# Altium PCB PCB.PcbDoc
Units mil, origin at the board's own origin, x right, y up, seen from the top; angles counter-clockwise.
Board outline 1390 x 1665 mil, 2 copper layers (Top Layer, Bottom Layer); 19 components, 11 nets, 53 pads, 7 vias.
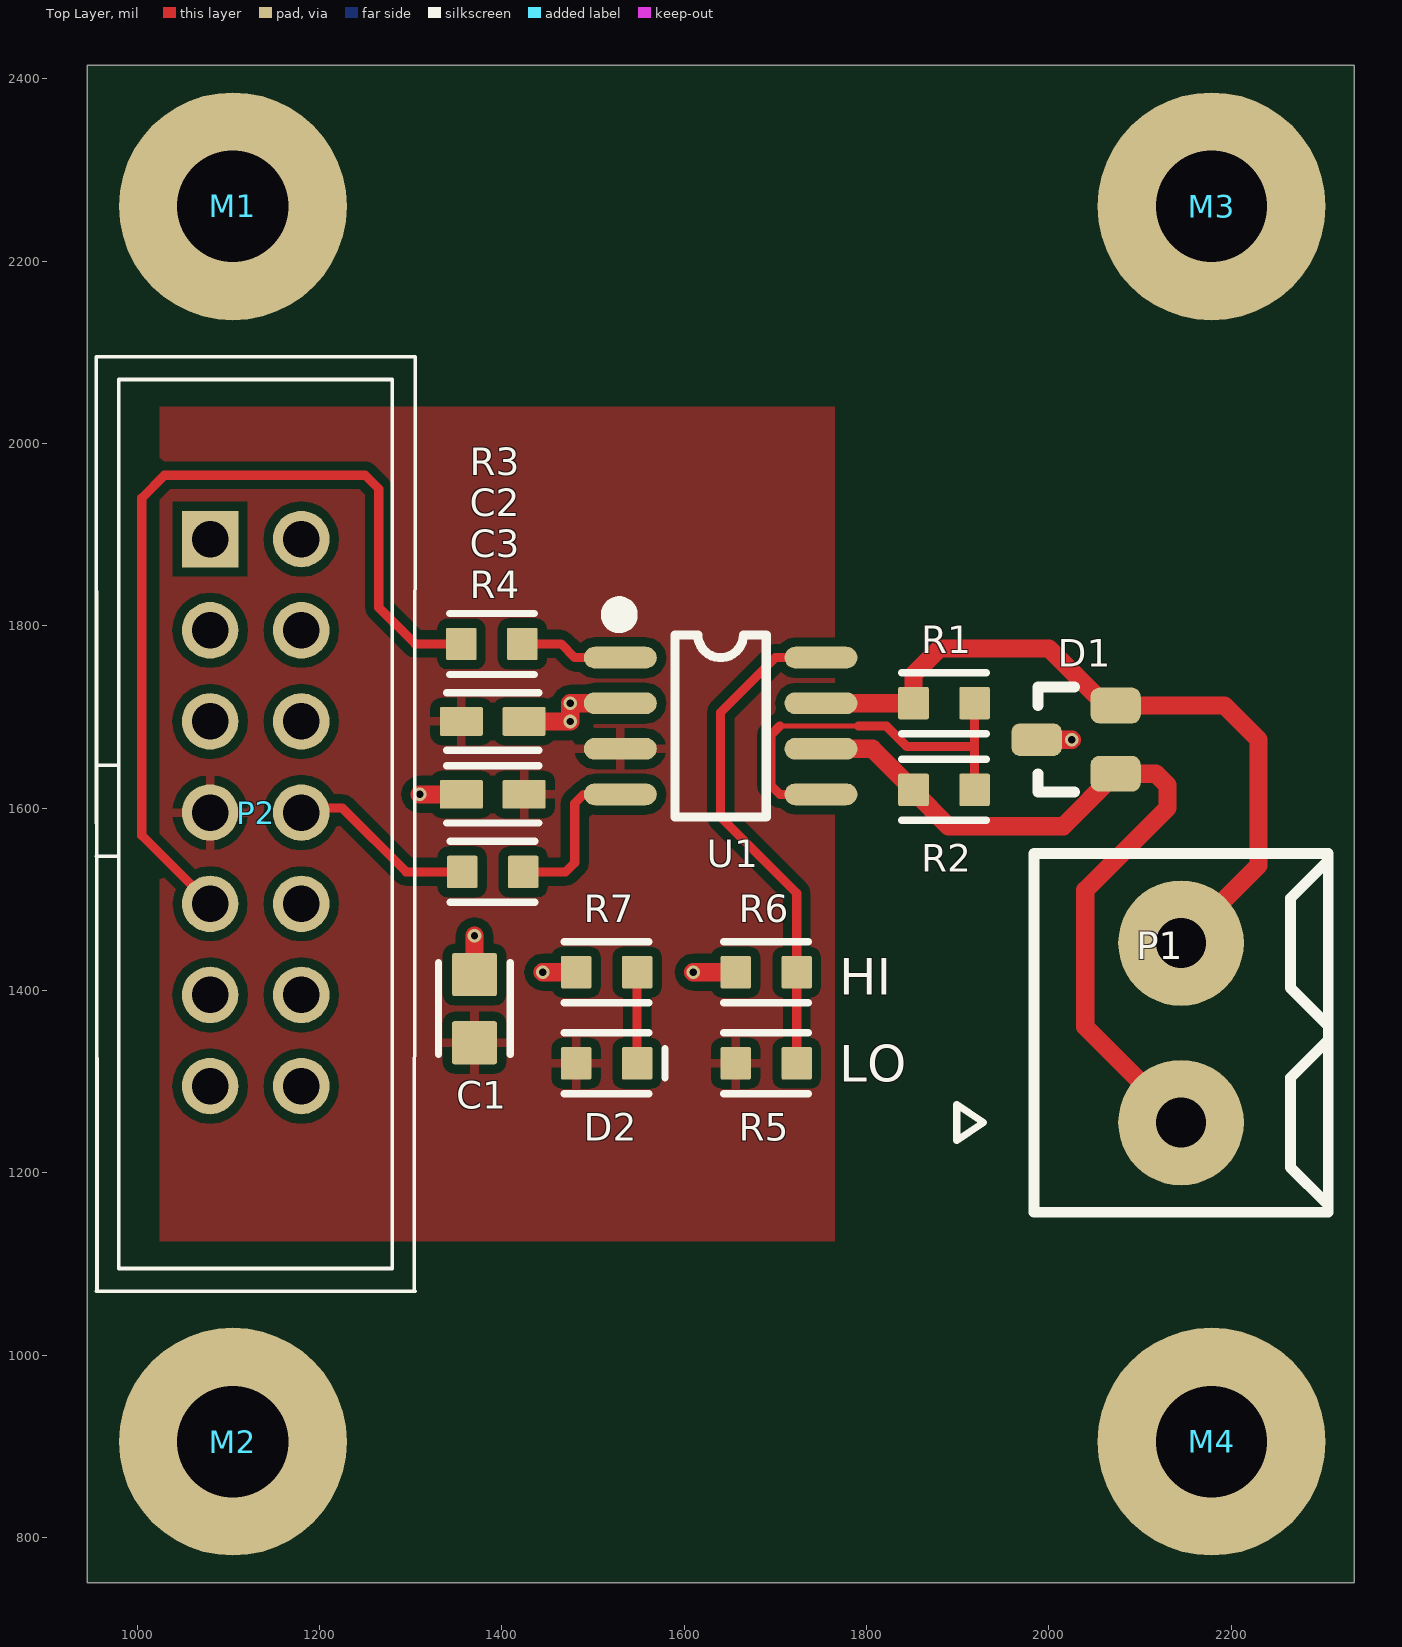
[diagram p0: Top Layer view]
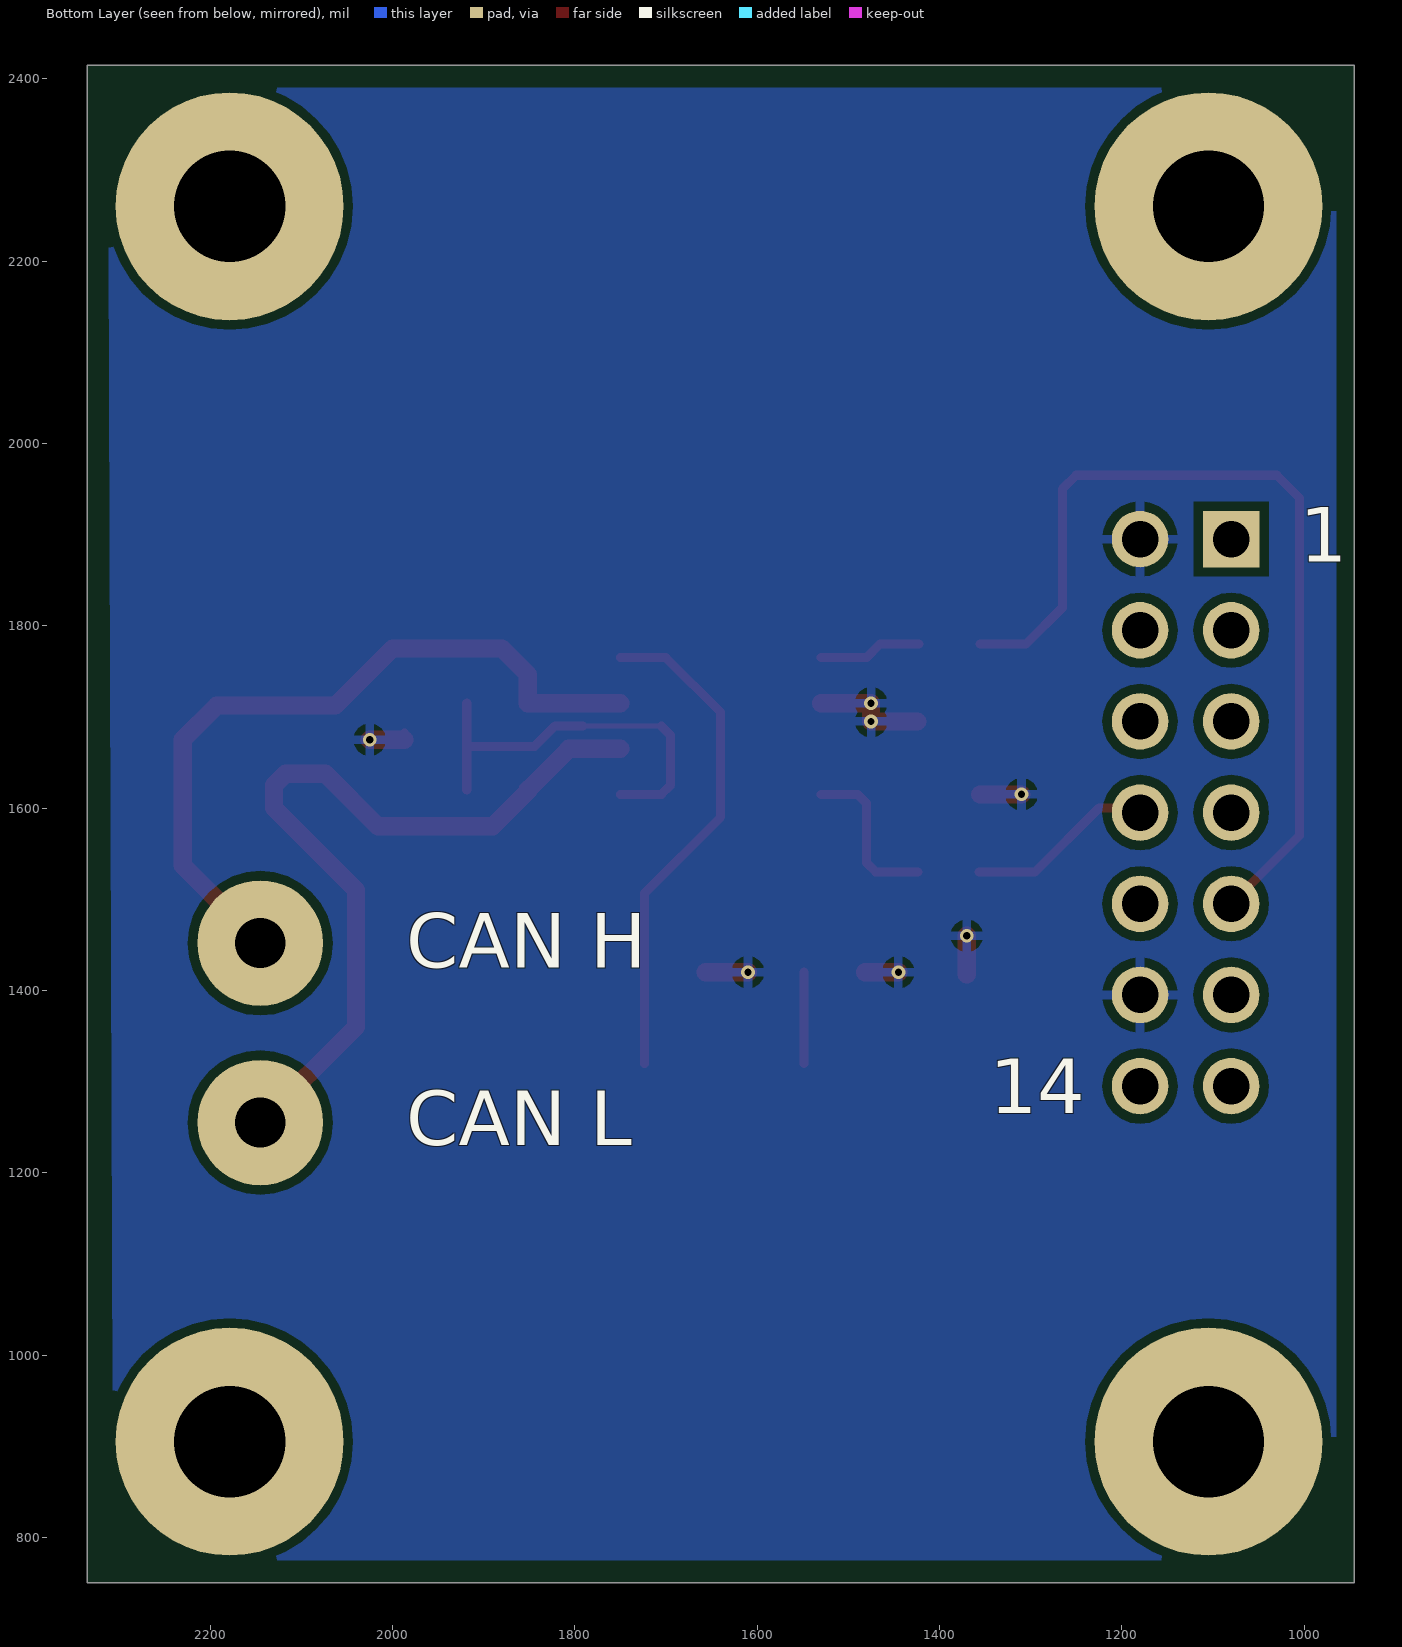
[diagram p1: Bottom Layer view, seen from below]
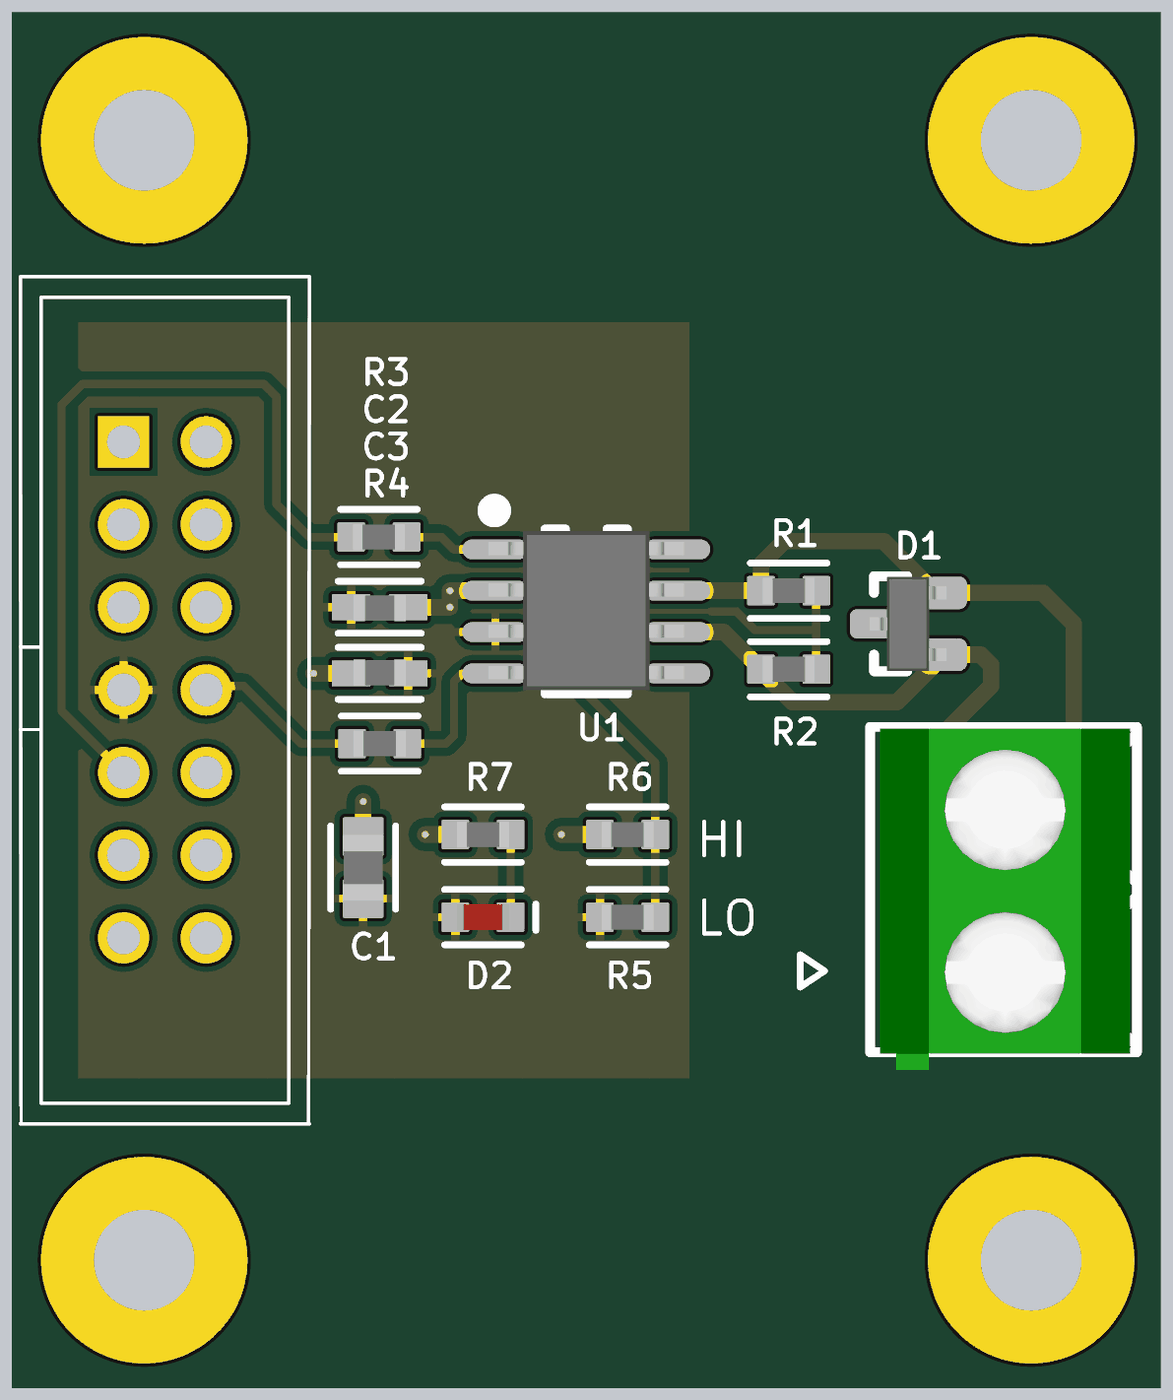
[diagram p2: 3D render of the assembled board from above, using the file's embedded part models]

## Layer stack, top to bottom
Top Solder: solder mask 0.4, Solder Resist, Dk 3.5
Top Layer: signal copper 1.4
Dielectric 1: dielectric 12.6, FR-4, Dk 4.8
Bottom Layer: signal copper 1.4
Bottom Solder: solder mask 0.4, Solder Resist, Dk 3.5

## Board outline
945,750 945,2415 2335,2415 2335,750

## Design rules (kind name [scope] priority, off if disabled: settings)
Clearance [All] p1: gap=10
PolygonConnect [All] p1: connectstyle=Relief reliefconductorwidth=10 reliefentries=4 polygonreliefangle="90 Angle" airgapwidth=10
RoutingVias [All] p1: holewidth=28 width=50 viastyle="Through Hole" minholewidth=28 minwidth=50 maxholewidth=28 maxwidth=50
SolderMaskExpansion [All] p1: expansion=4
Width [All] p1: maxlimit=1000 minlimit=6 preferedwidth=10
30 further rules are at their usual default settings.

## Classes and differential pairs
component class Shematic: C1 C2 C3 D1 D2 P1 P2 R1 R2 R3 R4 R5 R6 R7 U1

## Components (designator, comment, footprint, x,y, rotation, side; value= is the part's Value field where it differs from the comment)
C1 "GRM21BR61A106KE19L" CAPC2012 1370,1380 r90 top
C2 "GCM188R71C105KA64D" CAPC1608 1390,1695 r0 top
C3 "GRJ188R71H104KE11D" CAPC1608 1390,1615 r180 top
D1 "SZNUP2105LT3G" SOT23_A2A1K 2030,1675 r180 top
D2 "LTST-C191KGKT" LEDC1608M_AK 1515,1320 r0 top
M1 "M" MOUNTING 1105,2260 r0 top
M2 "M" MOUNTING 1105,905 r0 top
M3 "M" MOUNTING 2178.5,2260 r0 top
M4 "M" MOUNTING 2178.5,905 r0 top
P1 "Header 2" TERM_BLOCK_2_HORZ_RIACON01 2145,1255 r90 top
P2 "Header 7X2" IDC14-B 1080,1895 r270 top
R1 "CR0603-FX-60R4ELF" RESC1608 1885,1715 r180 top
R2 "CR0603-FX-60R4ELF" RESC1608 1885,1620 r0 top
R3 "CR0603-FX-23R2ELF" RESC1608 1389.02,1780 r180 top
R4 "CR0603-FX-23R2ELF" RESC1608 1390,1530 r180 top
R5 "CR0603-J/-000ELF" RESC1608 1690,1320 r180 top
R6 "CR0603-J/-000ELF" RESC1608 1690,1420 r0 top
R7 "CR0603-FX-1001ELF" RESC1608 1515,1420 r0 top
U1 "SN65HVD230D" SOIC127P580-8N 1640,1690 r0 top

## Footprints (in the part's own frame and the unit in brackets; to place one, negate y for a bottom-side part, rotate by r counter-clockwise, add the part's x,y. Pads: shape width x height; smd on the part's side, far side on the other; paste and mask are expansions set on the pad)
CAPC1608 [mm] "Chip Capacitor, Non Polarised 1.6mm x 0.8mm x ?mm (0603)"
  rrect10% 1.2x0.8 smd: 1(-0.875,0) 2(0.875,0)
  silkscreen extent -1.28,-0.8 1.28,0.8, body extent -0.8,-0.43 0.8,0.39, height 0.86
CAPC2012 [mm] "Chip Capacitor, Non Polarised 2.0mm x 1.2mm x ?mm (0805)"
  rrect10% 1.2x1.25 smd: 1(-0.95,0) 2(0.95,0)
  silkscreen extent -1.28,-1 1.28,1, body extent -1,-0.63 1,0.63, height 1.27
IDC14-B [mil]
  rect 62x62 hole 40: 1(0,0)
  round 62 hole 40: 2(0,100) 3(100,0) 4(100,100) 5(200,0) 6(200,100) 7(300,0) 8(300,100) 9(400,0) 10(400,100) 11(500,0) 12(500,100) 13(600,0) 14(600,100)
  silkscreen extent -200,-125 825,225, body extent -202,-125 825,225, height 358
LEDC1608M_AK [mm] "LED, Chip, 0603"
  rrect10% 0.85x0.9 smd: A(-0.85,0) K(0.85,0)
  silkscreen extent -1.18,-0.85 1.62,0.85, body extent -0.8,-0.4 0.8,0.39, height 1.09
MOUNTING [mm]
  round 6.35 hole 3.1: 1(0,0)
RESC1608 [mm] "Chip Resistor, 1.6mm x 0.8mm x ?mm (0603)"
  rrect10% 0.85x0.9 smd: 1(-0.85,0) 2(0.85,0)
  silkscreen extent -1.18,-0.85 1.18,0.85, body extent -0.8,-0.4 0.8,0.4, height 0.4
SOIC127P580-8N [mil]
  oval 80x24 smd: 1(-110,75) 2(-110,25) 3(-110,-25) 4(-110,-75) 5(110,-75) 6(110,-25) 7(110,25) 8(110,75)
  silkscreen extent -119,-100 50,130, body extent -118,-95 118,97, height 61
SOT23_A2A1K [mm]
  rrect50% 1.4x1 smd: 1(-1.1,0.95) 2(-1.1,-0.95)
  rrect50% 1.4x0.9 smd: 3(1.1,0)
  silkscreen extent 0.04,-1.46 1.06,1.46, body extent -1.17,-1.45 1.2,1.45, height 1
TERM_BLOCK_2_HORZ_RIACON01 [mm]
  round 3.5 hole 1.4: 1(0,0) 2(5,0)
  silkscreen extent -2.5,-4.1 7.5,6.25, body extent -3.05,-3.9 7.45,3.8, height 10.05

## Part data
C1: "Multilayer Ceramic Capacitors MLCC - SMD/SMT 0805 10uF 10volts X5R 10%"
C2: "Multilayer Ceramic Capacitors MLCC - SMD/SMT 0603 1.0uF 16volts X7R 10%"
C3: "Multilayer Ceramic Capacitors MLCC - SMD/SMT 0603 0.10uF 50volts X7R +/-10% Soft Term"
D1: "TVS DIODE 24VWM 44VC SOT23"
D2: "LED GREEN CLEAR 0603 SMD"
M1 M2 M3 M4: library part MOUNTING, "MOUNTING HOLE - NON INSTALLABLE"
P1: "Header, 2-Pin"
P2: "Header, 7-Pin, Dual row"
R1 R2: "RES SMD 60.4 OHM 1% 1/10W 0603"
R3 R4: "RES SMD 23.2 OHM 1% 1/10W 0603"
R5 R6: "RES SMD 0.0OHM JUMPER 1/10W 0603"
R7: "RES SMD 1K OHM 1% 1/10W 0603"
U1: "IC CAN TRANSCEIVER 3.3V 8-SOIC"

## Via types
v1: diameter 15, hole 8, Top Layer to Bottom Layer, tented both sides, 7 vias

## Nets (pads, with @x,y where several pads share a name; then routed paths per layer and width w, separated by ;. In a path a pad name is that pad's centre, name@x,y a point inside that pad or via, vN(x,y) a via of type N, cw(c..) or ccw(c..) an arc to the next point about the centre after c; other vN are vias at no path point)
CANGND: R1.1 R2.2 U1.5 | length 446.1
  Top Layer w6: 1705,1690 1791.18,1690
  Top Layer w10: 1705,1690 1695,1680 1695,1625 1705,1615 U1.5 ; 1791.18,1690 1821.85,1690 1844.35,1667.5 1918.46,1667.5 ; R2.2 1918.46,1667.5 ; R1.1 1918.46,1667.5
GND: C1.2 C2.2 C3.2 D1.3 P2.2 P2.12 R6.1 R7.1 U1.2 | length 342.4
  Top Layer w10: D1.3 D1.3@1986.69,1682.28
  Top Layer w20: v1(1310,1615) C3.2 ; C1.2 v1(1370,1460) ; C2.2 v1(1475,1695) v1(1475,1715) U1.2 ; v1(1445,1420) R7.1 ; v1(1610,1420) R6.1 ; D1.3 v1(2025,1675)
NetD1_1: D1.1 P1.1 R2.1 U1.6 | length 896
  Top Layer w20: U1.6 1806.54,1665 R2.1 1851.54,1618.46 1890,1580 2015.71,1580 D1.1 2117.4,1637.6 2130,1625 2130,1600 2040,1510 2040,1360 P1.1
NetD1_2: D1.2 P1.2 R1.2 U1.7 | length 823.1
  Top Layer w20: U1.7 R1.2 1851.54,1746.54 1880,1775 2000,1775 2062.6,1712.4 D1.2 2192.6,1712.4 2230,1675 2230,1536.85 P1.2
NetD2_K: D2.K R7.2 | length 100
  Top Layer w10: D2.K R7.2
NetP2_8: P2.8 R4.2 | length 207.6
  Top Layer w10: P2.8 1185,1600 1225,1600 1295,1530 R4.2
NetP2_9: P2.9 R3.2 | length 1014.8
  Top Layer w10: P2.9@1080,1470 P2.9 1005,1570 1005,1940 1030,1965 1250,1965 1265,1950 1265,1820 1305,1780 R3.2
NetR3_1: R3.1 U1.1 | length 113.7
  Top Layer w10: R3.1 1465,1780 1480,1765 U1.1
NetR4_1: R4.1 U1.4 | length 179.9
  Top Layer w10: R4.1 1470,1530 1480,1540 1480,1605.14 1489.86,1615 U1.4
RS: R5.1 R6.2 U1.8 | length 634.4
  Top Layer w10: R5.1 R6.2 ; 1723.46,1340 1723.46,1506.54 1640,1590 1640,1705 1700,1765 U1.8
VCC: C1.1 C2.1 C3.1 D2.A P2.7 R5.2 U1.3
pads on no net: M1.1 M2.1 M3.1 M4.1 P2.1 P2.3 P2.4 P2.5 P2.6 P2.10 P2.11 P2.13 P2.14

## Polygon pours and split planes (outlines as drawn)
GND on Bottom Layer "GND" (solid, remove dead copper, pour order 2): 965,775 2305.86,775 2311.94,2390 965,2390
VCC on Top Layer "VCC" (solid, remove dead copper, pour order 4): 1050,1125 1765,1125 1765,2040 1295,2040 1025,2040 1025,1125

## Silkscreen, mask and mechanical layers (free items; w line width, h text height)
Top Overlay:
  text "HI" at 1770,1395 h40
  text "LO" at 1770,1300 h40
Bottom Overlay:
  text "1" at 1005,1870 h60
  text "CAN H" at 1985,1425 h60
  text "14" at 1345,1265 h60
  text "CAN L" at 1985,1230 h60
Mechanical 1:
  the board outline again, w5.91